# Altium PCB I2C_Step_12V_Ann.PcbDoc
Units mm, origin at the board's own origin, x right, y up, seen from the top; angles counter-clockwise.
Board outline 50 x 55 mm, 2 copper layers (Top Layer, Bottom Layer); 51 components, 37 nets, 207 pads, 53 vias.
Unrouted connection lines stored in the file: 6.
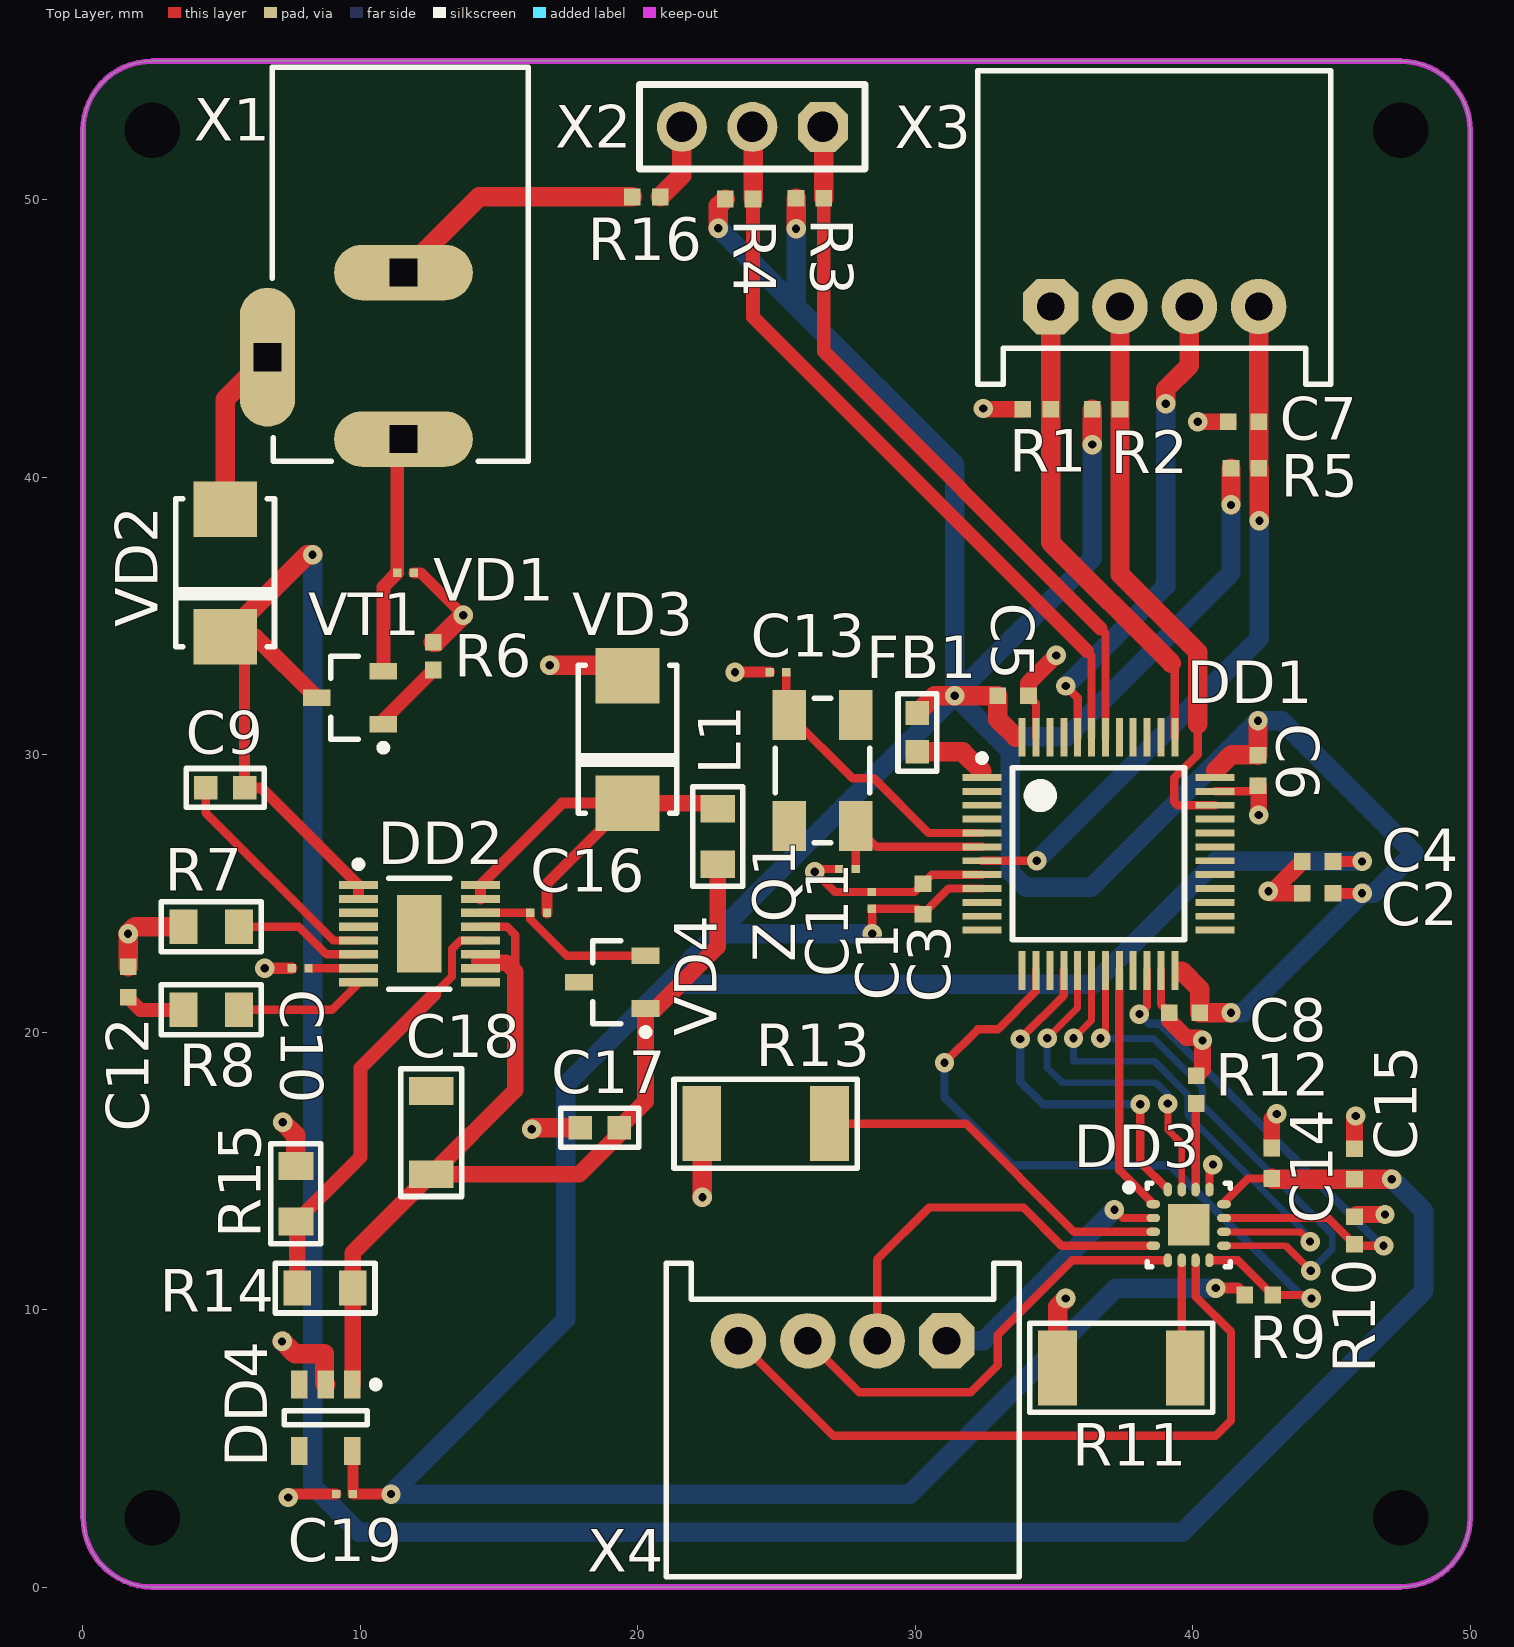
[diagram p0: Top Layer view]
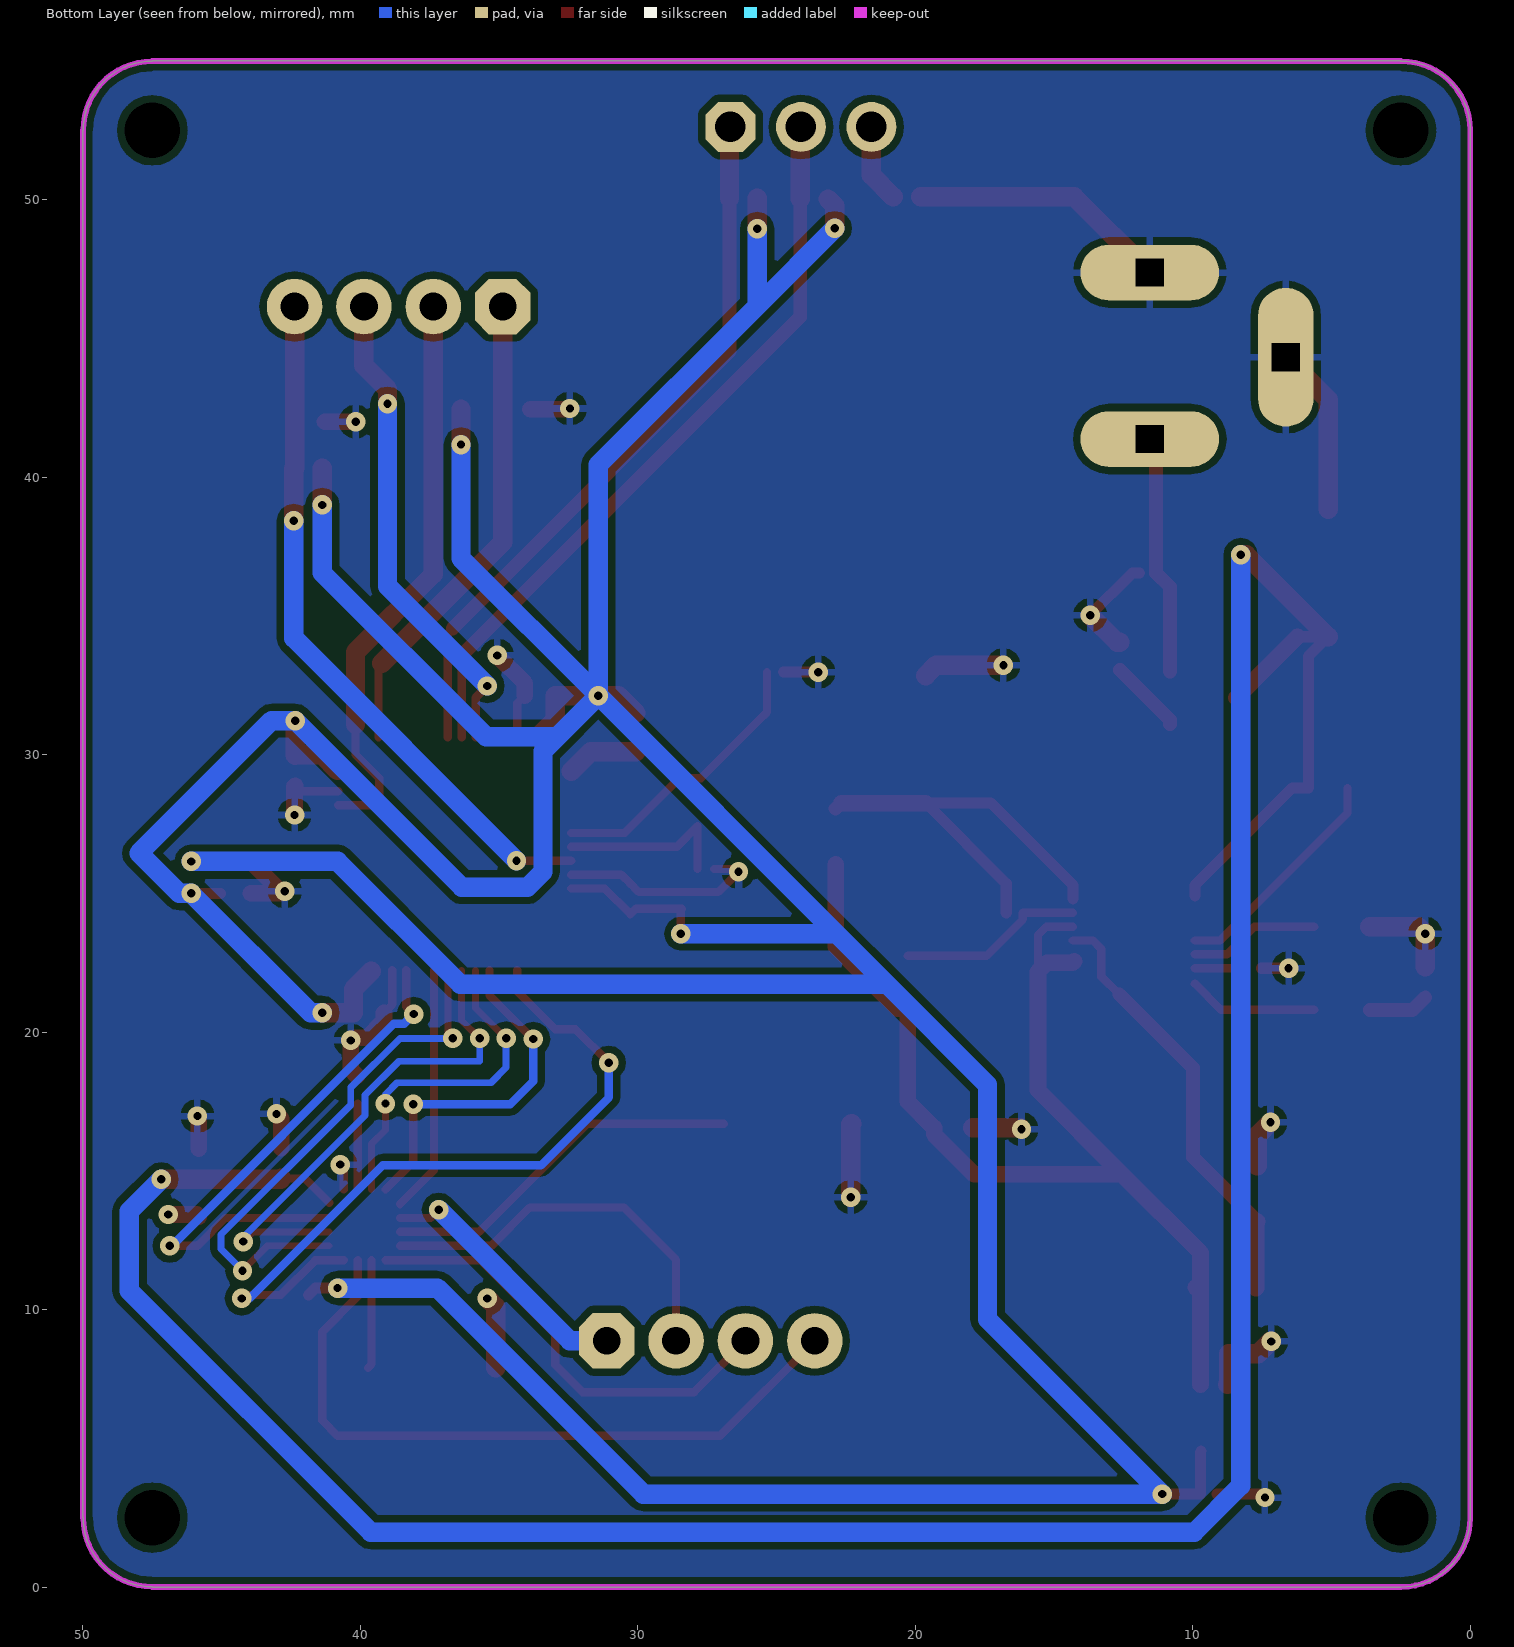
[diagram p1: Bottom Layer view, seen from below]
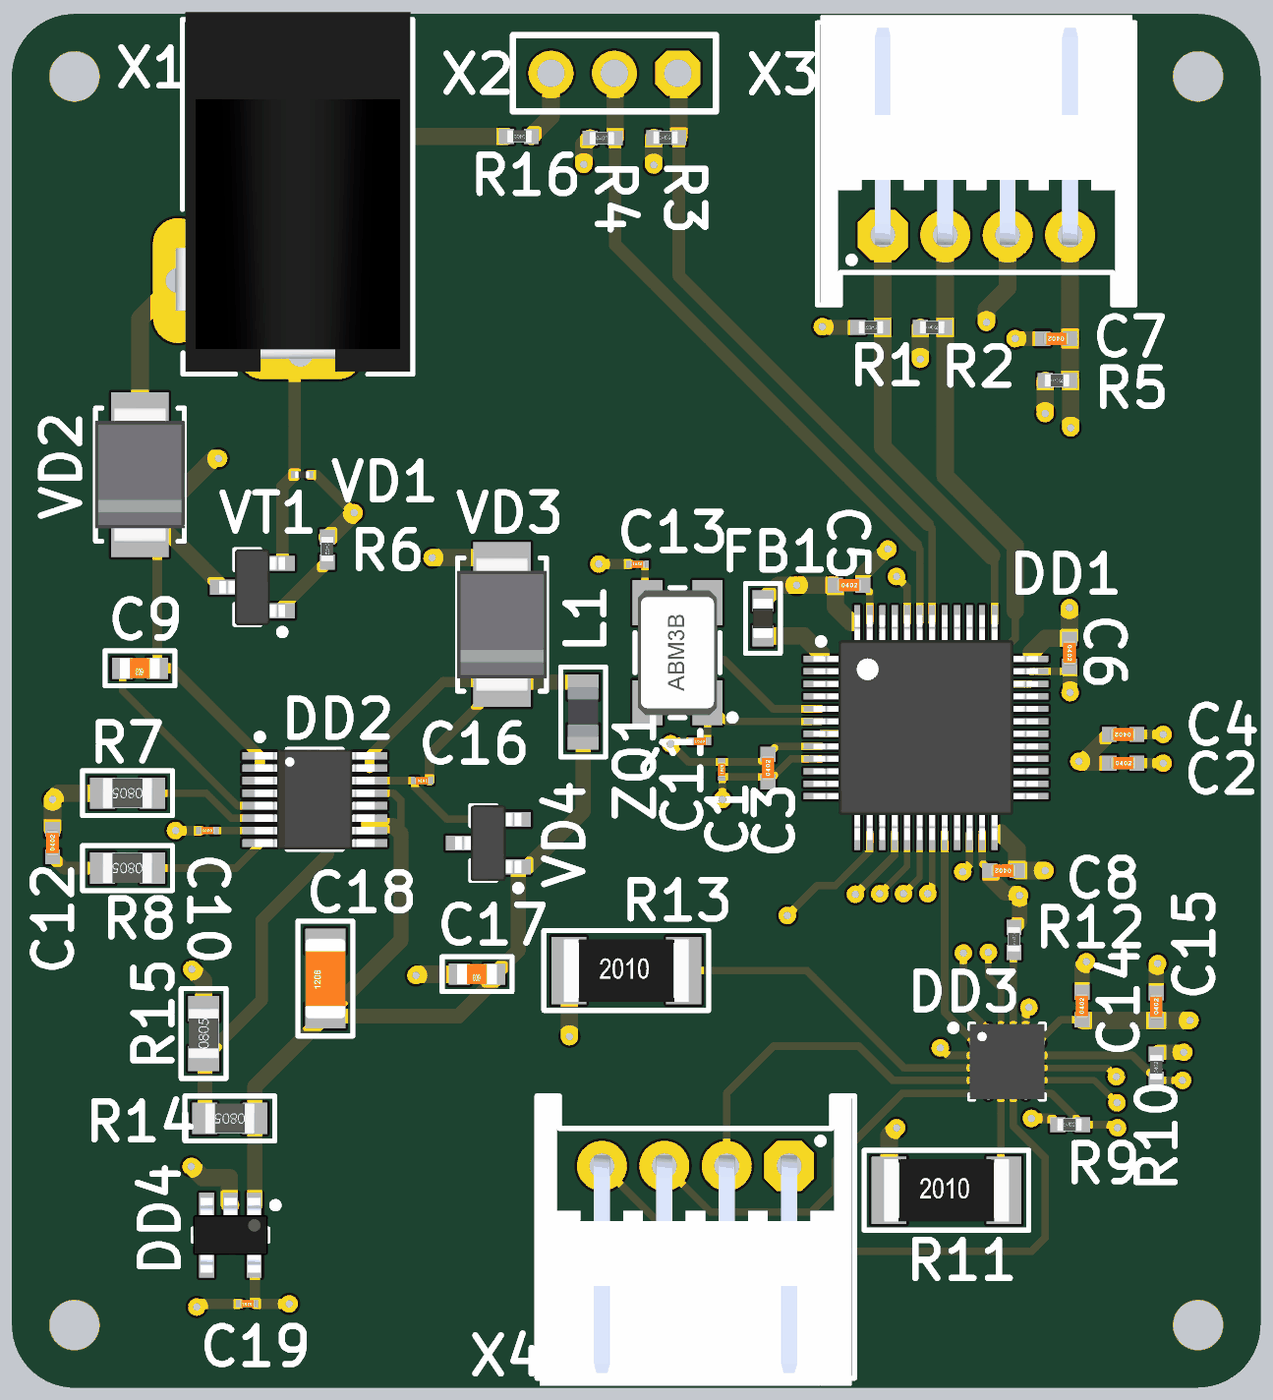
[diagram p2: 3D render of the assembled board from above, using the file's embedded part models]

## Layer stack, top to bottom
Top Solder: solder mask 0.0102, Solder Resist, Dk 3.5
Top Layer: signal copper 0.0356
Dielectric 1: dielectric 0.32, FR-4, Dk 4.8
Bottom Layer: signal copper 0.0356
Bottom Solder: solder mask 0.0102, Solder Resist, Dk 3.5

## Board outline
0,2.5 0,52.5 0,52.501 cw(c2.492,52.501) 2.492,54.993 2.5,55 47.5,55 47.5,54.992 cw(c47.5,52.5) 49.992,52.5 50,52.5 50,2.5 49.992,2.5 cw(c47.5,2.5) 47.5,0.008 47.5,0 2.5,0 2.499,0 cw(c2.499,2.492)

## Design rules (kind name [scope] priority, off if disabled: settings)
Clearance [All] p1: gap=0.254 ignorepadtopadclearanceinfootprint=FALSE except(0: Arc-Hole Track-Hole SMDPad-Hole THPad-Hole Via-Hole Fill-Hole Poly-Hole Region-Hole Text-Hole)
PolygonConnect [All] p1: connectstyle=Relief reliefconductorwidth=0.254 reliefentries=4 polygonreliefangle="90 Angle" airgapwidth=0.254
RoutingVias [All] p1: holewidth=0.711 width=1.27 viastyle="Through Hole" minholewidth=0.711 minwidth=1.27 maxholewidth=0.711 maxwidth=1.27
SolderMaskExpansion [All] p1: expansion=0.102
Width [All] p1: maxlimit=1 minlimit=0.25 preferedwidth=0.3
30 further rules are at their usual default settings.

## Components (designator, comment, footprint, x,y, rotation, side; value= is the part's Value field where it differs from the comment)
C1 "Capacitor" CH0201C 28.425,24.75 r270 top
C2 "Capacitor" CH0402C 44.5,25 r0 top
C3 "Capacitor" CH0402C 30.275,24.8 r90 top
C4 "Capacitor" CH0402C 44.5,26.15 r180 top
C5 "Capacitor" CH0402C 33.525,32.125 r0 top
C6 "Capacitor" CH0402C 42.35,29.425 r270 top
C7 "Capacitor" CH0402C 41.825,42 r180 top
C8 "Capacitor" CH0402C 39.7,20.7 r180 top
C9 "Capacitor" CH0603C 5.125,28.8 r180 top
C10 "Capacitor" CH0201C 7.825,22.3 r180 top
C11 "Capacitor" CH0201C 27.55,25.875 r180 top
C12 "Capacitor" CH0402C 1.625,21.8 r90 top
C13 "Capacitor" CH0201C 25.05,32.975 r180 top
C14 "Capacitor" CH0402C 42.85,15.275 r90 top
C15 "Capacitor" CH0402C 45.825,15.25 r90 top
C16 "Capacitor" CH0201C 16.425,24.3 r0 top
C17 "Capacitor" CH0603C 18.625,16.55 r180 top
C18 "Capacitor" CH1206C 12.55,16.375 r90 top
C19 "Capacitor" CH0201C 9.425,3.35 r180 top
DD1 "STM32F103C8T6" "STM32F103 48pins" 36.6,26.425 r0 top
DD2 "LT3697" LT3697 12.125,23.55 r0 top
DD3 "DRV8847" DRV8847 39.85,13.05 r0 top
DD4 "TLV755P" SOT23-5 8.75,6.1 r270 top
FB1 "Ferrite bead" CH0603L 30.075,30.8 r270 top
L1 "*" CH0805L 22.875,27.05 r270 top
R1 "Res_0.125" CH0402R 34.375,42.45 r180 top
R2 "Res_0.125" CH0402R 36.875,42.45 r0 top
R3 "Res_0.125" CH0402R 26.2,50.05 r0 top
R4 "Res_0.125" CH0402R 23.65,50.025 r0 top
R5 "Res_0.125" CH0402R 41.875,40.325 r0 top
R6 "Res_0.125" CH0402R 12.625,33.55 r270 top
R7 "Res_0.125" CH0805R 4.625,23.8 r180 top
R8 "Res_0.125" CH0805R 4.625,20.8 r180 top
R9 "Res_0.125" CH0402R 42.375,10.525 r0 top
R10 "Res_0.125" CH0402R 45.825,12.85 r90 top
R11 "Res_1" CH2010R 37.425,7.9 r0 top
R12 "Res_0.125" CH0402R 40.125,17.925 r270 top
R13 "Res_1" CH2010R 24.6,16.7 r0 top
R14 "Res_0.125" CH0805R 8.725,10.775 r180 top
R15 "Res_0.125" CH0805R 7.675,14.175 r90 top
R16 "Res_0.125" CH0402R 20.3,50.1 r180 top
VD1 "TVS-diod_simmetrical" CH0201L 11.625,36.55 r180 top
VD2 "TVS-diod_directed" DO214AA 5.125,36.55 r270 top
VD3 "Diod Schottky" DO214AA 19.625,30.55 r270 top
VD4 "Diod Schottky" SOT23_132 19.075,21.8 r180 top
VT1 "*" SOT23_132 9.625,32.05 r180 top
X1 "2_pins" "CON: 163-179PH-EX" 11.55,55.075 r270 top
X2 "3_pins" "CON: PBS-3" 24.125,52.625 r180 top
X3 "4_pins" "CON: CWF-4R" 38.625,46.15 r0 top
X4 "STEPPER MOTOR" "CON: CWF-4R" 27.375,8.875 r180 top
ZQ1 "Oscillator" "OSC: 5032" 26.65,29.425 r90 top

## Footprints (in the part's own frame and the unit in brackets; to place one, negate y for a bottom-side part, rotate by r counter-clockwise, add the part's x,y. Pads: shape width x height; smd on the part's side, far side on the other; paste and mask are expansions set on the pad)
CH0201C [mm]
  rect 0.3x0.3 smd: 1(-0.3,0) 2(0.3,0)
  body extent -0.3,-0.15 0.3,0.15, height 0.31
CH0201L [mm]
  rect 0.3x0.3 smd: 1(-0.3,0) 2(0.3,0)
  body extent -0.3,-0.15 0.3,0.15, height 0.3
CH0402C [mm]
  rect 0.6x0.6 smd: 1(-0.55,0) 2(0.55,0)
  body extent -0.51,-0.25 0.51,0.25, height 0.51
CH0402R [mm]
  rect 0.6x0.6 smd: 1(-0.5,0) 2(0.5,0)
  body extent -0.52,-0.25 0.47,0.25, height 0.34
CH0603C [mm] "Chip Capacitor, 2-Leads, Body 1,53x0,85mm, IPC Medium Density"
  rect 0.85x0.85 smd: 1(-0.7,0) 2(0.7,0)
  silkscreen extent -1.4,-0.7 1.4,0.7, body extent -0.8,-0.4 0.8,0.4, height 0.3
CH0603L [mm]
  rect 0.85x0.85 smd: 1(-0.7,0) 2(0.7,0)
  silkscreen extent -1.4,-0.7 1.4,0.7, body extent -0.8,-0.4 0.8,0.4, height 0.8
CH0805L [mm]
  rect 1x1.25 smd: 1(-1,0) 2(1,0)
  silkscreen extent -1.8,-0.9 1.8,0.9, body extent -1,-0.62 1,0.63, height 0.85
CH0805R [mm]
  rect 1x1.25 smd: 1(-1,0) 2(1,0)
  silkscreen extent -1.8,-0.9 1.8,0.9, body extent -1,-0.6 1,0.6, height 0.44
CH1206C [mm] "Non polar chip capacitor, size 1206"
  rect 1x1.6 smd: 1(-1.5,0) 2(1.5,0)
  silkscreen extent -2.3,-1.1 2.3,1.1, body extent -1.6,-0.8 1.6,0.8, height 1
CH2010R [mm]
  rect 1.4x2.7 smd: 1(-2.3,0) 2(2.3,0)
  silkscreen extent -3.3,-1.6 3.3,1.6, body extent -2.5,-1.25 2.5,1.25, height 0.6
"CON: 163-179PH-EX" [mm]
  oval 2x5 hole 1 square: 1(13.7,0) 2(7.7,0)
  oval 5x2 hole 1 square: 2(10.75,-4.9)
  round 0.5 on Mech1: ""(14,-3)
  silkscreen extent 0.3,-4.72 14.5,4.5, body extent 0,-5 14.4,4.4, height 11.05
"CON: CWF-4R" [mm]
  oct 2x2 hole 1: 1(-3.75,0)
  round 2 hole 1: 2(-1.25,0) 3(1.25,0) 4(3.75,0)
  round 0.5 on Mech1: ""(-5.6,-2.2)
  round 0.5 on Top Overlay: ""(-5,-1)
  silkscreen extent -6.38,-2.8 6.35,8.5, body extent -6.25,-2.7 6.25,8.8, height 5.75
"CON: PBS-3" [mm] "PBS-3"
  oct 1.8x1.8 hole 1.1: 1(-2.54,0)
  round 1.8 hole 1.1: 2(0,0) 3(2.54,0)
  silkscreen extent -4.06,-1.52 4.06,1.52
DO214AA [mm] "SMB"
  rect 2x2.3 smd: 1(-2.3,0) 2(2.3,0)
  round 0.5 on Mech1: ""(2.1,1.3)
  silkscreen extent -2.67,-1.78 2.67,1.78, body extent -2.7,-1.8 2.7,1.8, height 2.3
DRV8847 [mm] "PQFN127P600-8N"
  oval 0.5x0.3 smd: 1(-1.275,0.75) 2(-1.275,0.25) 3(-1.275,-0.25) 4(-1.275,-0.75) 9(1.275,-0.75) 10(1.275,-0.25) 11(1.275,0.25) 12(1.275,0.75)
  oval 0.3x0.5 smd: 5(-0.75,-1.275) 6(-0.25,-1.275) 7(0.25,-1.275) 8(0.75,-1.275) 13(0.75,1.275) 14(0.25,1.275) 15(-0.25,1.275) 16(-0.75,1.275)
  rect 1.5x1.5 smd: 17(0,0)
  silkscreen extent -2.27,-1.5 1.5,1.5, body extent -1.5,-1.5 1.5,1.5, height 0.75
LT3697 [mm] "TSSOP, 16-Leads, Body 4,00x3,00mm, Pitch 0,50mm, Thermal Pad 2,80x1,60mm, IPC Medium Density"
  rect 1.4x0.3 smd: 1(-2.2,1.75) 2(-2.2,1.25) 3(-2.2,0.75) 4(-2.2,0.25) 5(-2.2,-0.25) 6(-2.2,-0.75) 7(-2.2,-1.25) 8(-2.2,-1.75) 9(2.2,-1.75) 10(2.2,-1.25) 11(2.2,-0.75) 12(2.2,-0.25) 13(2.2,0.25) 14(2.2,0.75) 15(2.2,1.25) 16(2.2,1.75)
  rect 1.6x2.8 smd: 17(0,0)
  silkscreen extent -2.32,-2 1.1,2.62, body extent -2.44,-2 2.44,2, height 1.1
"OSC: 5032" [mm]
  round 0.5 on Top Overlay: 1(-2.6,-2.2)
  rect 1.8x1.2 smd: 1(-2,-1.2) 2(2,-1.2) 3(2,1.2) 4(-2,1.2)
  round 0.5 on Mech1: ""(-2,-1.1)
  silkscreen extent -2.6,-1.7 2.6,1.7, body extent -2.5,-1.59 2.5,1.59, height 1.1
SOT23-5 [mm] "SOT23, 5-Leads, Body 2,90x2,80mm, Pitch 0,95mm, IPC Medium Density"
  rect 1x0.6 smd: 1(-1.2,0.95) 2(-1.2,0) 3(-1.2,-0.95) 4(1.2,-0.95) 5(1.2,0.95)
  round 0.5 on Mech1: ""(-1.1,1.1)
  silkscreen extent -1.32,-1.5 0.25,1.93, body extent -1.5,-1.5 1.5,1.5, height 1.3
SOT23_132 [mm] "SOT23, 3-Leads, Body 3,0x2,6mm (max), Pitch 0,95mm, IPC Medium Density"
  rect 1x0.6 smd: 1(-1.2,0.95) 2(-1.2,-0.95) 3(1.2,0)
  round 0.5 on Mech1: ""(-0.9,1.1)
  silkscreen extent -1.33,-1.5 0.7,1.92, body extent -1.32,-1.52 1.32,1.52, height 1.12
"STM32F103 48pins" [mm] "TSQFP, 48-Leads, Body 7,00x7,00mm, Pitch 0,50mm, IPC Medium Density"
  rect 1.4x0.25 smd: 1(-4.2,2.75) 2(-4.2,2.25) 3(-4.2,1.75) 4(-4.2,1.25) 5(-4.2,0.75) 6(-4.2,0.25) 7(-4.2,-0.25) 8(-4.2,-0.75) 9(-4.2,-1.25) 10(-4.2,-1.75) 11(-4.2,-2.25) 12(-4.2,-2.75) 25(4.2,-2.75) 26(4.2,-2.25) 27(4.2,-1.75) 28(4.2,-1.25) 29(4.2,-0.75) 30(4.2,-0.25) 31(4.2,0.25) 32(4.2,0.75) 33(4.2,1.25) 34(4.2,1.75) 35(4.2,2.25) 36(4.2,2.75)
  rect 0.25x1.4 smd: 13(-2.75,-4.2) 14(-2.25,-4.2) 15(-1.75,-4.2) 16(-1.25,-4.2) 17(-0.75,-4.2) 18(-0.25,-4.2) 19(0.25,-4.2) 20(0.75,-4.2) 21(1.25,-4.2) 22(1.75,-4.2) 23(2.25,-4.2) 24(2.75,-4.2) 37(2.75,4.2) 38(2.25,4.2) 39(1.75,4.2) 40(1.25,4.2) 41(0.75,4.2) 42(0.25,4.2) 43(-0.25,4.2) 44(-0.75,4.2) 45(-1.25,4.2) 46(-1.75,4.2) 47(-2.25,4.2) 48(-2.75,4.2)
  silkscreen extent -4.32,-3.1 3.1,3.57, body extent -4.5,-4.5 4.5,4.5, height 1.6

## Part data
C1 C19: Capacitance=1мк, Case=0201, Manufacture="Murata Electronics", Voltage=10В, HelpURL=https://ru.mouser.com/ProductDetail/Murata-Electronics/GRM033C81A105ME05E?qs=sGAEpiMZZMs0AnBnWHyRQN7%2fAA2D2lPPXfhIkJ3ChWM%252bNp28BKy3Ug%3d%3d, Model=GRM033C81A105ME05E
C2: Capacitance=4,7мк, Case=0402, Manufacture="Murata Electronics", Voltage=10В, HelpURL=https://ru.mouser.com/ProductDetail/Murata-Electronics/ZRB15XR61A475KE01D?qs=sGAEpiMZZMs0AnBnWHyRQO9VYadaKTO%252beZnE9zFUsbv4FmCibz4ZfQ%3d%3d, Model=ZRB15XR61A475KE01D
C3: Capacitance=0,01мк, Case=0402, Manufacture=Yageo, Voltage=10В, HelpURL=https://ru.mouser.com/ProductDetail/Yageo/CC0402MRX7R6BB103?qs=sGAEpiMZZMs0AnBnWHyRQCF1lTWZ1EBLC11KxQK9NtY%3D, Model=CC0402MRX7R6BB103
C4 C5 C6 C7 C8 C14: Capacitance=0,1мк, Case=0402, Manufacture=AVX, Voltage=10В, HelpURL=https://ru.mouser.com/ProductDetail/AVX/0402ZD103KAT2A?qs=sGAEpiMZZMs0AnBnWHyRQKdiqyDPVQdAu74W%2fwwRq8A%3d, Model=0402ZD103KAT2A
C9 C17: Capacitance=4,7мк, Case=0603, Manufacture="Murata Electronics", Voltage=16В, HelpURL=https://ru.mouser.com/ProductDetail/Murata-Electronics/GRM188R61C475KAAJD?qs=sGAEpiMZZMs0AnBnWHyRQHS%2f3XE0oMwxE3tFP4oDIiY%3d, Model=GRM188R61C475KAAJD
C10 C16: Capacitance=100, Case=0201, Manufacture=KEMET, Voltage=10В, HelpURL=https://ru.mouser.com/ProductDetail/KEMET/C0201C101K8GACTU?qs=sGAEpiMZZMs0AnBnWHyRQB5KqWiNAtmEn9gsTWOdKS%252b7RrFbxqtALA%3d%3d, Model=C0201C101K8GACTU
C11 C13: Capacitance=30, Case=0201, Manufacture=KEMET, Voltage=10В, HelpURL=https://ru.mouser.com/ProductDetail/KEMET/CBR02C308B8GAC?qs=sGAEpiMZZMs0AnBnWHyRQKJCfzG%2fi9wHnix1yOwfSPhOUzhoHh%252bTpQ%3d%3d, Model=CBR02C308B8GAC
C12: Capacitance=330, Case=0402, Manufacture="Vishay / Vitramon", Voltage=10В, HelpURL=https://ru.mouser.com/ProductDetail/Vishay-Vitramon/VJ0402Y331MXQCW1BC?qs=sGAEpiMZZMs0AnBnWHyRQHefeAIkSpb%2fKjIwGvKZvs8%3d, Model=VJ0402Y331MXQCW1BC
C15: Capacitance=10мк, Case=0402, Manufacture=Yageo, Voltage=10В, HelpURL=https://ru.mouser.com/ProductDetail/Yageo/CC0402MRX5R6BB106?qs=sGAEpiMZZMsh%252B1woXyUXj67dvM3QAimZTx2LImfM178%3D, Model=CC0402MRX5R6BB106
C18: Capacitance=100мк, Case=1206, Manufacture=TDK, Voltage=10В, HelpURL=https://ru.mouser.com/ProductDetail/TDK/C3216X5R1A107M160AC?qs=sGAEpiMZZMs0AnBnWHyRQEWjzA2rN6H9eWVfGykJv7Q%3d, Model=C3216X5R1A107M160AC
DD1: library part STM32, Case=LQFP48, Manufacture=STMicroelectronics, HelpURL=https://www.st.com/en/microcontrollers-microprocessors/stm32f103c8.html, Model=STM32F103C8T6
DD2: "6~18 to 5", Manufacture="Analog Devices", HelpURL=https://www.analog.com/en/products/lt3697.html, Model=LT3697
DD3: Case=TSSOP, Manufacture="Texas Instruments", HelpURL=http://www.ti.com/product/DRV8847, Model=DRV8847
DD4: library part "LDO +3.3V", Case=SOT-23, Manufacture="Texas Instruments", HelpURL=http://www.ti.com/product/TLV755P?keyMatch=TLV755P&tisearch=Search-EN-Everything, Model=TLV755P
FB1: Case=0603, Manufacture=murata, Max current=2A, HelpURL=https://www.murata.com/en-us/products/productdetail?partno=BLM18PG121SN1%23, Impedance=120, Model=BLM18PG121SN1#
L1: library part Inductor, Case=0805, Inductance=3,3мк, Manufacture="Murata Electronics", Max current=1А, HelpURL=https://ru.mouser.com/ProductDetail/Murata-Electronics/LQM21PZ3R3MGRD?qs=sGAEpiMZZMsg%252by3WlYCkU2iuTbKTbm6Zxs6Ix4GkUPA%3d, Impedance=150м, Model=LQM21PZ3R3MGRD
R1 R2 R5 R6 R9 R10 R12 R16: Case=0402, Manufacture=Yageo, HelpURL=https://ru.mouser.com/ProductDetail/Yageo/AC0402FR-7W10KL?qs=sGAEpiMZZMvdGkrng054txbN%2f5LBcxld3gyqgmBuiXRPLjwmdNqO3A%3d%3d, Impedance=10К, Model=AC0402FR-7W10KL
R3 R4: Case=0402, Manufacture="KOA Speer", HelpURL=https://ru.mouser.com/ProductDetail/KOA-Speer/SG73P1ETTP1001F?qs=sGAEpiMZZMvdGkrng054t%2f16WM9J8YovCYtiWkW5%2faA%3d, Impedance=1К, Model=SG73P1ETTP1001F
R7 R8 R14 R15: Case=0805, Manufacture="Panasonic Industrial Devices"
  R7: HelpURL=https://ru.mouser.com/ProductDetail/Panasonic-Industrial-Devices/ERJ-6ENF4872V?qs=sGAEpiMZZMvdGkrng054tx7%2f6%252bNA3LAJLLBsBMFOrm0%3d, Impedance=48,7К, Model=ERJ-6ENF4872V
  R8 R14 R15: HelpURL=https://ru.mouser.com/ProductDetail/Panasonic-Industrial-Devices/ERJ-6ENF9091V?qs=sGAEpiMZZMvdGkrng054tx7%2f6%252bNA3LAJZkxjwUnWjWM%3d, Impedance=9,09К, Model=ERJ-6ENF9091V
R11 R13: Case=2010, Manufacture="Vishay Dale", Power=1Вт, HelpURL=https://www.digikey.com/product-detail/en/CRCW20101K69FKEF/541-1.69KACCT-ND/1179159?WT.z_cid=ref_netcomponents_dkc_buynow&utm_source=netcomponents&utm_medium=aggregator&utm_campaign=buynow, Impedance=0,8, Model=CRCW20101K69FKEF
VD1: Case=0201, Clamping Voltage=12В, Manufacturer=Littelfuse, HelpURL=https://ru.mouser.com/ProductDetail/Littelfuse/SP3022-01WTG?qs=sGAEpiMZZMsItbzKdwyIez7NGmqnzL8h47KYC2e%252bM%2f4NVETz1A7KGA%3d%3d, Model=SP3022-01WTG
VD2: Case=DO-214AA-2, Clamping_Voltage=12В, Manufacturer=Bourns, HelpURL=https://ru.mouser.com/ProductDetail/Bourns/CD214B-T70ALF?qs=sGAEpiMZZMsItbzKdwyIexL102H4jKkFOiaKL2EcEgo%3d, Model=CD214B-T7.0ALF
VD3: Manufacturer=Rectron, HelpURL=https://ru.mouser.com/ProductDetail/Rectron/FM5822B-W?qs=sGAEpiMZZMtQ8nqTKtFS%2fGuc2LbLh1yNV0sywe9%2fy3k%3d, If=3А, Model=FM5822B-W, Vrrm=40В
VD4: Manufacturer=Toshiba, HelpURL=https://ru.mouser.com/ProductDetail/Toshiba/1SS374TE85LF?qs=sGAEpiMZZMtQ8nqTKtFS%2fOl9H8JU2QXlyYvmz0vcRmull8rlMQPxpQ%3d%3d, If=200мА, Model=1SS374(TE85L,F), Vrrm=15В
VT1: library part P-Channel, Manufacture="Diodes Incorporated", HelpURL=https://ru.mouser.com/ProductDetail/Diodes-Incorporated/DMG2301LK-7?qs=sGAEpiMZZMshyDBzk1%2fWi3VK%2fMVeCy7TGgocA8mg7FfG8rajAhy0Kw%3d%3d, Id=2,4А, Model=DMG2301LK-7, Vgs=300мВ, Vsd=20В
X2 X3: Manufacture="Omron Electronics"
  X2: 1=SBA, 2=SCL, 3=GND, HelpURL=https://ru.mouser.com/ProductDetail/Omron-Electronics/XN2D-1371?qs=sGAEpiMZZMvd2mIcYG7oaC0TeQEBnk0J8ExArlTDElw%3D, Model=XN2D-1371
  X3: 1=SWCLK, 2=SWDIO, 3=BOOT0, 4=NRST, HelpURL=https://ru.mouser.com/ProductDetail/Omron-Electronics/XN2D-4471?qs=sGAEpiMZZMvd2mIcYG7oaC0TeQEBnk0JvHtcE4UuDS0%3D, Model=XN2D-4471
X4: library part 4_pins, "Bipolar Stepper Motor 200 Step 0.35A 12VDC", Case=20x20x28mm, Manufacture=stepperonline, ManufactureConnector="Omron Electronics", 1=A, 2=C, 3=B, 4=D, HelpURL=https://www.omc-stepperonline.com/nema-8-stepper-motor/nema-8-bipolar-18deg-16ncm-23ozin-02a-48v-20x20x28mm-4-wires-8hs11-0204s.html, HelpURLConnector=https://ru.mouser.com/ProductDetail/Omron-Electronics/XN2D-4471?qs=sGAEpiMZZMvd2mIcYG7oaC0TeQEBnk0JvHtcE4UuDS0%3D, Model=8HS11-0204S, ModelConnector=XN2D-4471
ZQ1: Case=5x3,2mm, Freq=8МГц, Manufacture="CTS Electronic Components", HelpURL=https://ru.mouser.com/ProductDetail/CTS-Electronic-Components/636L3C008M00000?qs=sGAEpiMZZMt8zWNA7msRCjl4WCD9T6KEFNudNQm%252BeAU%3D, Model=636L3C008M00000
X1: HelpURL=https://ru.farnell.com/gct-global-connector-technology/dcj250-10-a-k1-k/dc-power-jack-5a-20vdc-black/dp/2524130?st=power%20jack, Vcc=+12В

## Free pads (board coordinates)
  round 0 hole 2: ""(2.5,2.5) ""(2.5,52.5) ""(47.5,2.5) ""(47.5,52.5)

## Via types
v1: diameter 0.7, hole 0.3, Top Layer to Bottom Layer, 53 vias

## Nets (pads, with @x,y where several pads share a name; then routed paths per layer and width w, separated by ;. In a path a pad name is that pad's centre, name@x,y a point inside that pad or via, vN(x,y) a via of type N, cw(c..) or ccw(c..) an arc to the next point about the centre after c; other vN are vias at no path point)
+3,3В: C1.2 C2.2 C3.1 C4.1 C5.1 C6.1 C8.1 C19.1 DD1.9 DD1.24 DD1.36 DD1.48 DD4.5 FB1.1 R2.1 R3.1 R4.1 R5.1 R9.1 | length 212.8
  Top Layer w0.3: v1(28.45,23.55) 28.45,24.425 C1.2 30.075,24.45 C3.1 31.2,25.175 DD1.9
  Top Layer w0.4: DD4.5 9.729,4.871 C19.1@9.729,3.35 ; C19.1 C19.1@9.729,3.35 ; v1(11.1,3.35) C19.1@9.729,3.35 ; v1(40.825,10.775) 41.625,10.775 R9.1 ; C2.2 v1(46.1,25) ; C4.1 v1(46.1,26.15)
  Top Layer w0.7: v1(22.9,48.975) 22.9,49.775 R4.1 ; v1(25.7,48.95) R3.1 ; FB1.1 30.7,32.125 v1(31.425,32.125) C5.1 32.975,31.271 33.621,30.625 ; v1(36.375,41.175) R2.1 ; 39.604,22.2 40.25,21.554 C8.1 v1(41.375,20.7) ; 40.825,29.429 41.396,30 C6.1@42.35,30 ; v1(41.375,39) R5.1 ; C6.1 C6.1@42.35,30 ; v1(42.35,31.225) C6.1@42.35,30
  Bottom Layer w0.7: v1(22.9,48.975) 25.7,46.175 ; v1(25.7,48.95) 25.7,46.175 ; v1(28.45,23.55) 22.85,23.55 ; v1(36.375,41.175) 36.375,37.075 v1(31.425,32.125) ; v1(40.825,10.775) 37.225,10.775 29.8,3.35 v1(11.1,3.35) 17.4,9.65 17.4,18.1 21.025,21.725 ; v1(41.375,20.7) 41.8,20.7 v1(46.1,25) 46.525,25 47.975,26.45 43.2,31.225 v1(42.35,31.225) 36.346,25.221 33.98,25.221 33.421,25.78 33.421,30.129 32.9,30.65 ; v1(41.375,39) 41.375,36.55 35.475,30.65 32.9,30.65 ; v1(46.1,26.15) 40.825,26.15 36.4,21.725 21.025,21.725 ; 21.025,21.725 22.85,23.55 ; 22.85,23.55 v1(31.425,32.125) ; 25.7,46.175 31.425,40.45 v1(31.425,32.125) ; v1(31.425,32.125) 32.9,30.65
+5В: C17.1 C18.1 DD2.10 DD2.11 DD2.13 DD4.1 L1.2 R14.1 VD4.1 | length 40.5
  Top Layer w0.3: DD2.13 15.275,23.8 15.579,23.496 15.579,22.179
  Top Layer w0.6: DD4.1@9.725,7.3 R14.1 ; R14.1@9.9,10.8 9.8,10.7 R14.1 ; 14.279,22.55 14.325,22.504 15.254,22.504 15.579,22.179 15.579,17.904 C18.1 ; L1.2 22.875,23.075 20.65,20.85 VD4.1 20.275,17.5 C17.1 19.325,16.317 17.883,14.875 C18.1 ; R14.1 9.725,12.05 C18.1
+12В: C9.1 C14.1 C15.1 DD2.1 DD2.2 DD3.12 VD2.2 VT1.3 | length 109.1
  Top Layer w0.3: DD3.12@41.125,13.854 41.996,14.725 C14.1
  Top Layer w0.4: VD2.2@6.225,34.25 VD2.2 5.825,33.55 C9.1 6.425,28.8 DD2.1 DD2.2@9.925,24.904
  Top Layer w0.6: VD2.2@6.225,34.25 VT1.3
  Top Layer w0.7: VD2.2 8.075,37.2 v1(8.275,37.2) ; C14.1 42.875,14.7 C15.1 v1(47.175,14.7)
  Bottom Layer w0.7: v1(8.275,37.2) 8.275,3.65 9.95,1.975 39.625,1.975 48.325,10.675 48.325,13.55 v1(47.175,14.7)
GND: C1.1 C2.1 C3.2 C4.2 C5.2 C6.2 C7.2 C8.2 C9.2 C10.2 C11.2 C12.2 C13.2 C14.2 C15.2 C17.2 C18.2 C19.2 DD1.8 DD1.23 DD1.35 DD1.47 DD2.5 DD2.17 DD3.13 DD4.2 R1.2 R6.1 R7.2 R10.2 R11.1 R12.1 R13.1 R15.2 R16.2 VD1.1 VD2.1 VD3.1 X1.2 | length 78.1
  Top Layer w0.3: C9.2 4.425,27.9 9.025,23.3 DD2.5 ; C11.2 26.475,25.875 v1(26.375,25.775) 27.1,25.05 C1.1 29.975,25.05 C3.2 30.6,25.675 DD1.8 ; C5.2 34.35,31.85 DD1.47 ; DD1.23 38.85,21 C8.2 ; DD3.13 40.6,15.1 v1(40.725,15.225) ; DD1.35 42.15,28.675 C6.2
  Top Layer w0.4: v1(6.55,22.3) C10.2 ; v1(7.4,3.225) 7.525,3.35 C19.2 ; VD1.1 12.175,36.55 v1(13.7,35.025) ; v1(23.5,32.975) C13.2
  Top Layer w0.6: v1(32.45,42.475) 32.475,42.45 R1.2 ; C5.2 34.075,32.575 v1(35.075,33.575) ; C8.2 39.15,20.417 39.771,19.796 40.254,19.796 v1(40.35,19.7) 40.35,18.65 R12.1 ; v1(40.175,42) C7.2 ; C6.2 42.375,28.85 v1(42.375,27.825) ; C14.2 42.85,16.875 v1(43.025,17.05) ; C2.1 42.8,25 v1(42.725,25.075) 42.875,25.075 C4.2 ; R10.2 45.9,13.425 v1(46.925,13.425) ; C15.2 45.825,16.925 v1(45.875,16.975)
  Top Layer w0.7: C12.2 v1(1.625,23.55) 1.875,23.8 R7.2 ; VD2.1 5.125,42.8 X1.2@6.65,44.325 ; v1(7.175,8.85) 7.2,8.85 7.646,8.404 8.704,8.404 8.704,7.346 DD4.2 ; v1(7.2,16.75) 7.675,16.275 R15.2 ; X1.2@11.55,47.375 14.275,50.1 R16.2 ; R6.1 12.725,34.05 v1(13.7,35.025) ; v1(16.175,16.5) 16.225,16.55 C17.2 ; v1(16.825,33.225) 19.25,33.225 VD3.1 ; R13.1 22.325,16.675 v1(22.325,14.05) ; R11.1 35.125,10.1 v1(35.425,10.4)
NetC7_1: C7.1 DD1.7 R5.2 X3.4 | length 25.3
  Top Layer w0.3: DD1.7 v1(34.375,26.175)
  Top Layer w0.7: X3.4 C7.1 R5.2 42.4,40.3 v1(42.4,38.425)
  Bottom Layer w0.7: v1(34.375,26.175) 42.4,34.2 v1(42.4,38.425)
NetC10_1: C10.1 DD2.7 | length 1.8
  Top Layer w0.3: C10.1 DD2.7
NetC11_1: C11.1 DD1.6 ZQ1.1@27.85,27.425 | length 6.4
  Top Layer w0.3: C11.1 27.85,27.425 28.6,26.675 DD1.6
NetC12_1: C12.1 R8.2 | length 2.2
  Top Layer w0.5: C12.1 2.075,20.8 R8.2
NetC13_1: C13.1 DD1.5 ZQ1.3 | length 10.3
  Top Layer w0.3: C13.1 25.35,31.525 ZQ1.3 27.725,29.15 28.5,29.15 30.475,27.175 DD1.5
NetC16_1: C16.1 DD2.14 VD4.2 | length 6.7
  Top Layer w0.3: DD2.14 C16.1 16.125,24.064 17.439,22.75 VD4.2
NetC16_2: C16.2 DD2.15 DD2.16 L1.1 VD3.2 | length 15.5
  Top Layer w0.4: DD2.15 DD2.16 17.275,28.25 VD3.2 16.725,25.35 C16.2
  Top Layer w0.5: L1.1@22.675,28.25 L1.1
  Top Layer w0.6: VD3.2 L1.1@22.675,28.25
NetDD1_1: DD1.1 FB1.2 | length 2.6
  Top Layer w0.7: FB1.2 31.704,30.1 32.4,29.404
NetDD1_14: DD1.14 DD3.8 R9.2 | length 26.8
  Top Layer w0.3: v1(31.05,18.9) 32.25,20.1 32.975,20.1 34.35,21.475 DD1.14 ; DD3.8 41.625,11.775 R9.2 44.15,10.525 v1(44.275,10.4)
  Bottom Layer w0.3: v1(31.05,18.9) 31.05,17.65 33.5,15.2 39.2,15.2 44,10.4 v1(44.275,10.4)
NetDD1_16: DD1.16 DD3.16 | length 12.8
  Top Layer w0.3: v1(33.775,19.75) 35.35,21.325 DD1.16 ; v1(38.1,17.4) 38.1,15.325 DD3.16
  Bottom Layer w0.3: v1(33.775,19.75) 33.775,18.225 34.6,17.4 v1(38.1,17.4)
NetDD1_17: DD1.17 DD3.15 | length 12.3
  Top Layer w0.25: v1(34.75,19.775) 35.85,20.875 DD1.17 ; v1(39.1,17.425) 39.1,16.475 39.6,15.975 DD3.15
  Bottom Layer w0.25: v1(34.75,19.775) 34.75,18.725 35.3,18.175 38.675,18.175 39.1,17.75 v1(39.1,17.425)
NetDD1_18: DD1.18 DD3.10 | length 18.5
  Top Layer w0.25: v1(35.7,19.775) 36.35,20.425 DD1.18 ; DD3.10 43.875,12.8 v1(44.225,12.45)
  Bottom Layer w0.25: v1(35.7,19.775) 35.7,18.95 38.613,18.95 39.829,17.734 39.829,16.996 44.225,12.6 v1(44.225,12.45)
NetDD1_19: DD1.19 DD3.9 | length 19.3
  Top Layer w0.25: v1(36.675,19.775) 36.85,19.95 DD1.19 ; DD3.9 43.35,12.3 v1(44.25,11.4)
  Bottom Layer w0.25: v1(36.675,19.775) 38.575,19.775 40.35,18 40.35,17.375 45.025,12.7 45.025,12.175 v1(44.25,11.4)
NetDD1_20: DD1.20 DD3.1 | length 8.9
  Top Layer w0.3: DD1.20 37.35,15.025 DD3.1
NetDD1_22: DD1.22 DD3.11 R10.1 | length 20.1
  Top Layer w0.3: v1(38.075,20.65) 38.35,20.925 DD1.22 ; DD3.11 44.875,13.3 R10.1 45.875,12.3 v1(46.875,12.3)
  Bottom Layer w0.3: v1(38.075,20.65) 38.421,20.304 38.794,20.304 46.798,12.3 v1(46.875,12.3)
NetDD1_34: DD1.34 R2.2 X3.2 | length 20.9
  Top Layer w0.3: 40.179,31.1 40.179,30.004 39.325,29.15 39.325,28.3 39.45,28.175 DD1.34
  Top Layer w0.7: X3.2 R2.2 37.375,36.499 40.179,33.695 40.179,31.1
NetDD1_37: DD1.37 R1.1 X3.1 | length 17.4
  Top Layer w0.3: 39.225,33.3 39.35,33.175 DD1.37
  Top Layer w0.7: X3.1 R1.1 34.875,37.65 39.225,33.3
NetDD1_42: DD1.42 R3.2 X2.1 | length 26.2
  Top Layer w0.3: 36.675,34.55 36.85,34.375 DD1.42
  Top Layer w0.5: R3.2 26.7,44.525 36.675,34.55
  Top Layer w0.7: X2.1 26.7,52.59 R3.2
NetDD1_43: DD1.43 R4.2 X2.2 | length 27.1
  Top Layer w0.3: 36.191,33.734 36.35,33.575 DD1.43
  Top Layer w0.5: R4.2 24.15,45.775 36.191,33.734
  Top Layer w0.7: X2.2 24.15,52.6 R4.2
NetDD1_44: DD1.44 X3.3 | length 17.5
  Top Layer w0.3: v1(35.425,32.475) 35.85,32.05 DD1.44
  Top Layer w0.7: v1(39.025,42.65) 39.025,43.175 39.875,44.025 X3.3
  Bottom Layer w0.7: v1(35.425,32.475) 39.025,36.075 v1(39.025,42.65)
NetDD2_6: DD2.6 R7.1 | length 4.7
  Top Layer w0.3: R7.1 7.775,23.8 8.775,22.8 DD2.6
NetDD2_8: DD2.8 R8.1 | length 4.7
  Top Layer w0.3: R8.1 8.979,20.8 DD2.8@9.925,21.746
NetDD2_12: DD2.12 R14.2 R15.1 | length 15.7
  Top Layer w0.3: 12.65,21.35 13.3,22 13.3,23 13.6,23.3 DD2.12
  Top Layer w0.5: R15.1 10,15.5 10,18.7 12.65,21.35
  Top Layer w0.6: R15.1 7.725,13.125 R14.2
NetDD3_2: DD3.2 X4.1 | length 9.6
  Top Layer w0.3: v1(37.175,13.6) 37.475,13.3 DD3.2
  Top Layer w0.4: X4.1 X4.1@31.2,8.95
  Bottom Layer w0.7: X4.1 32.45,8.875 v1(37.175,13.6)
NetDD3_3: DD3.3 R13.2 | length 13.3
  Top Layer w0.3: R13.2 31.825,16.7 35.725,12.8 DD3.3
NetDD3_4: DD3.4 X4.2 | length 14.2
  Top Layer w0.3: X4.2 28.625,11.8 30.5,13.675 33.9,13.675 35.275,12.3 DD3.4
NetDD3_5: DD3.5 X4.3 | length 16.4
  Top Layer w0.3: X4.3 27.975,7.025 32,7.025 32.975,8 32.975,9.1 35.65,11.775 DD3.5
NetDD3_6: DD3.6 R11.2 | length 3.9
  Top Layer w0.3: DD3.6 39.6,8.025 R11.2
NetDD3_7: DD3.7 X4.4 | length 25.7
  Top Layer w0.3: X4.4 27.05,5.45 40.825,5.45 41.375,6 41.375,9.2 40.1,10.475 DD3.7
NetDD3_14: DD3.14 R12.2 | length 3.1
  Top Layer w0.3: DD3.14 R12.2@40.1,17.425
NetR6_2: R6.2 VT1.1 | length 2.7
  Top Layer w0.5: VT1.1 10.825,31.25 R6.2
NetR16_1: R16.1 X2.3 | length 2.9
  Top Layer w0.7: R16.1 21.585,50.885 X2.3
NetVD1_2: VD1.2 VT1.2 X1.1 | length 8.6
  Top Layer w0.5: VT1.2 10.825,36.05 VD1.2 X1.1@11.325,41.375
pads on no net: DD1.2 DD1.3 DD1.4 DD1.10 DD1.11 DD1.12 DD1.13 DD1.15 DD1.21 DD1.25 DD1.26 DD1.27 DD1.28 DD1.29 DD1.30 DD1.31 DD1.32 DD1.33 DD1.38 DD1.39 DD1.40 DD1.41 DD1.45 DD1.46 DD2.3 DD2.4 DD2.9 DD3.17 DD4. DD4.3 DD4.4 VD2. VD3. VD4. VD4.3 VT1. X1. X3. X4. ZQ1. ZQ1.1@28.85,26.825 ZQ1.2 ZQ1.4

## Polygon pours and split planes (outlines as drawn)
GND on Bottom Layer "Bottom Layer-GND" (solid, remove dead copper, pour order 0): 0,55 50,55 50,0 0,0

## Keep-outs
Keep-Out Layer:
  lines w0.2: 0,2.5 0,52.5 ; 0,52.501 cw(c2.492,52.501) 2.492,54.993 ; 0.007,2.492 ccw(c2.499,2.492) 2.499,0 ; 2.5,0 47.5,0 ; 2.5,55 47.5,55 ; 47.5,0.008 ccw(c47.5,2.5) 49.992,2.5 ; 47.5,54.992 cw(c47.5,52.5) 49.992,52.5 ; 50,2.5 50,52.5

## Silkscreen, mask and mechanical layers (free items; w line width, h text height)
Mechanical 1:
  lines w0.2: 0,2.5 0,52.5 ; 2.5,0 47.5,0 ; 2.5,55 47.5,55 ; 50,2.5 50,52.5
  lines w0.254: 0,2.5 ccw(c2.5,2.5) 2.5,0 ; 0,52.5 cw(c2.5,52.5) 2.5,55 ; 47.5,0 ccw(c47.5,2.5) 50,2.5 ; 47.5,55 cw(c47.5,52.5) 50,52.5